# Altium PCB Acoustics Board.PcbDoc (part 2 of 2)
Units mm, origin at the board's own origin, x right, y up, seen from the top; angles counter-clockwise.
Board outline 152.4 x 101.6 mm, 2 copper layers (Top Layer, Bottom Layer); 115 components, 80 nets, 404 pads, 173 vias.
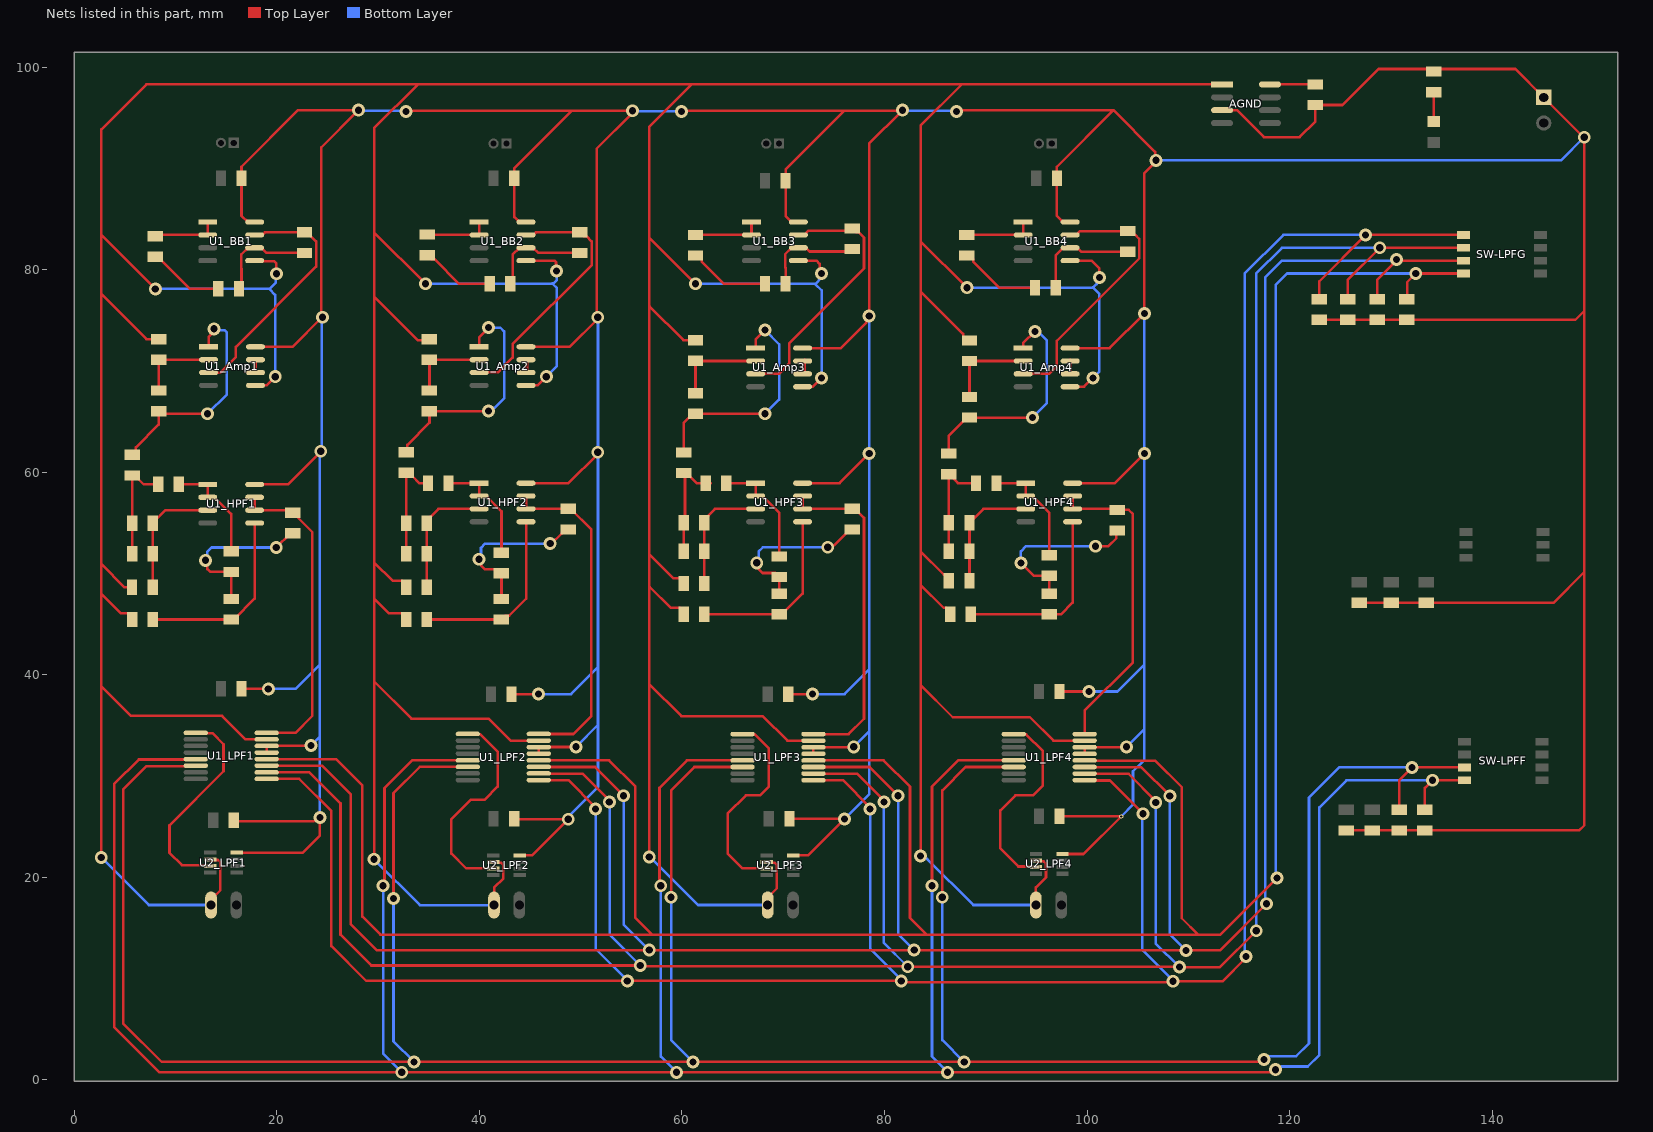
[diagram p2: the nets of this part, all layers, seen from the top]

## Via types
v1: diameter 1.27, hole 0.711, Top Layer to Bottom Layer, 172 vias
v2: diameter 0.4, hole 0.2, Top Layer to Bottom Layer, 1 vias

## Nets (pads, with @x,y where several pads share a name; then routed paths per layer and width w, separated by ;. In a path a pad name is that pad's centre, name@x,y a point inside that pad or via, vN(x,y) a via of type N, cw(c..) or ccw(c..) an arc to the next point about the centre after c; other vN are vias at no path point) (continued)
LPF_FC_SEL2: R3F.2 SW-LPFF.3 U1_LPF1.6 U1_LPF2.6 U1_LPF3.6 U1_LPF4.6 | length 303.3
  Top Layer w0.254: U1_LPF1.6@11.994,31.029 11.956,30.991 7.115,30.991 4.826,28.702 4.826,5.588 8.636,1.778 v1(33.535,1.778) v1(61.087,1.778) v1(87.869,1.778) 116.95,1.778 117.204,2.032 v1(117.479,2.032) ; v1(31.518,17.907) 31.518,28.32 34.11,30.912 U1_LPF2.6@38.809,30.912 ; v1(58.928,18.034) 58.928,28.596 61.232,30.9 U1_LPF3.6@65.931,30.9 ; v1(85.71,18.036) 85.71,28.598 88.014,30.902 U1_LPF4.6@92.713,30.902 ; R3F.2@130.81,26.67 130.81,29.591 v1(132.08,30.861) SW-LPFF.3@137.287,30.861
  Bottom Layer w0.254: v1(31.518,17.907) 31.518,3.816 v1@33.535,1.799 ; v1(58.928,18.034) 58.928,3.937 v1(61.087,1.778) ; v1(85.71,18.036) 85.71,3.939 v1@87.869,1.78 ; v1(117.479,2.032) 117.754,2.032 118.062,2.34 120.641,2.34 121.92,3.619 121.92,27.88 124.901,30.861 v1(132.08,30.861)
LPF_FC_SEL3: R4F.2 SW-LPFF.4 U1_LPF1.5 U1_LPF2.5 U1_LPF3.5 U1_LPF4.5 | length 312.1
  Top Layer w0.254: U1_LPF1.5@11.994,31.679 11.956,31.641 6.368,31.641 3.937,29.21 3.937,5.207 8.382,0.762 v1(32.329,0.762) v1@59.452,0.762 ; v1@30.502,19.177 30.629,19.303 30.629,28.828 33.363,31.562 U1_LPF2.5@38.862,31.563 ; v1(57.912,19.177) 57.785,19.304 57.785,28.85 60.485,31.55 U1_LPF3.5@65.984,31.55 ; v1@59.453,0.752 v1(86.234,0.752) 118.079,0.752 118.343,1.016 v1(118.618,1.016) ; v1(84.694,19.179) 84.694,28.979 87.267,31.552 U1_LPF4.5@92.766,31.552 ; R4F.2@133.35,26.67 133.35,28.829 v1(134.112,29.591) SW-LPFF.4@137.287,29.591
  Bottom Layer w0.254: v1(30.48,19.177) 30.502,19.155 30.502,2.611 v1@32.329,0.783 ; v1(57.912,19.177) 57.912,2.311 v1@59.452,0.771 ; v1(84.694,19.179) 84.694,2.312 v1@86.234,0.773 ; v1(118.618,1.016) 118.893,1.016 119.201,1.324 121.793,1.324 122.936,2.467 122.936,26.924 125.603,29.591 v1(134.112,29.591)
  other v1: 59.452,0.75
LPF_G_SEL0: R1FG.2 SW-LPFG.1 U1_LPF1.9 U1_LPF2.9 U1_LPF3.9 U1_LPF4.9 | length 287.8
  Top Layer w0.254: U1_LPF1.9@18.994,29.729 22.214,29.729 25.39,26.553 25.39,13.218 28.829,9.779 v1(54.61,9.779) v1(81.661,9.779) 81.788,9.652 108.406,9.652 v1(108.497,9.744) 113.376,9.744 115.697,12.065 v1(115.697,12.192) ; U1_LPF2.9@45.874,29.601 48.779,29.601 51.469,26.911 v1(51.469,26.75) ; U1_LPF3.9@72.984,29.601 75.889,29.601 v1@78.58,26.911 ; U1_LPF4.9@99.821,29.566 102.26,29.566 v1(105.537,26.289) ; R1FG.2@122.936,77.089 122.936,78.867 v1(127.508,83.439) SW-LPFG.1@137.16,83.439
  Bottom Layer w0.254: v1(51.469,26.75) 51.491,26.729 51.491,12.919 v1@54.61,9.8 ; v1@78.601,26.729 78.601,12.919 v1@81.721,9.8 ; v1(105.537,26.289) 105.438,26.19 105.438,12.884 v1@108.557,9.765 ; v1(115.697,12.192) 115.57,12.319 115.57,79.629 119.38,83.439 v1(127.508,83.439)
  other v1: 78.58,26.75
LPF_G_SEL1: R2FG.2 SW-LPFG.2 U1_LPF1.10 U1_LPF2.10 U1_LPF3.10 U1_LPF4.10 | length 283.5
  Top Layer w0.254: U1_LPF1.10@19.007,30.379 23.215,30.379 26.289,27.305 26.289,14.351 29.337,11.303 v1(55.88,11.303) 55.944,11.239 82.233,11.239 v1(82.296,11.176) 109.097,11.176 v1(109.132,11.141) 113.122,11.141 v1(116.713,14.732) ; U1_LPF2.10@45.874,30.251 50.172,30.251 52.832,27.592 v1(52.832,27.432) ; U1_LPF3.10@72.984,30.251 77.283,30.251 v1@79.943,27.592 ; U1_LPF4.10@99.821,30.216 104.12,30.216 v1@106.779,27.556 ; R2FG.2@125.73,77.089 125.73,78.994 v1(128.905,82.169) SW-LPFG.2@137.16,82.169
  Bottom Layer w0.254: v1(52.832,27.432) 52.854,27.41 52.854,14.35 v1@55.88,11.324 ; v1@79.964,27.41 79.943,27.389 79.943,13.529 v1(82.296,11.176) ; v1@106.779,27.353 106.779,13.494 v1(109.132,11.141) ; v1(116.713,14.732) 116.695,14.75 116.695,79.611 119.253,82.169 v1@128.778,82.169
  other v1: 106.779,27.397 79.943,27.432
LPF_G_SEL2: R3FG.2 SW-LPFG.3 U1_LPF1.11 U1_LPF2.11 U1_LPF3.11 U1_LPF4.11 | length 279
  Top Layer w0.254: U1_LPF1.11@18.994,31.029 24.47,31.029 27.305,28.194 27.305,15.367 29.845,12.827 v1(56.769,12.827) v1(82.931,12.827) 109.732,12.827 v1(109.767,12.792) ; U1_LPF2.11@45.874,30.901 51.427,30.901 54.229,28.1 v1(54.229,28.067) ; U1_LPF3.11@72.984,30.901 78.538,30.901 v1@81.34,28.1 ; U1_LPF4.11@99.821,30.866 105.375,30.866 v1@108.176,28.064 ; v1@109.771,12.795 109.774,12.792 113.122,12.792 v1(117.729,17.399) ; R3FG.2@128.651,77.089 128.651,78.994 v1@130.556,80.899 ; v1(130.57,81.02) 130.57,80.913 v1@130.556,80.899 ; SW-LPFG.3@137.16,80.899 v1@130.556,80.899
  Bottom Layer w0.254: v1(54.229,28.067) 54.251,28.045 54.251,15.366 v1@56.769,12.848 ; v1@81.361,28.045 81.34,28.024 81.34,14.418 v1(82.931,12.827) ; v1@108.176,27.988 108.176,14.383 v1(109.767,12.792) ; v1(117.729,17.399) 117.593,17.535 117.593,79.239 119.253,80.899 v1@130.175,80.899 ; v1@130.449,80.899 v1(130.57,81.02)
  other v1: 108.176,28.032 81.34,28.067
LPF_G_SEL3: R4FG.2 SW-LPFG.4 U1_LPF1.12 U1_LPF2.12 U1_LPF3.12 U1_LPF4.12 | length 275
  Top Layer w0.254: U1_LPF1.12@18.994,31.679 25.852,31.679 28.448,29.083 28.448,16.129 30.226,14.351 57.056,14.351 ; U1_LPF2.12@45.874,31.551 52.809,31.551 55.405,28.955 55.405,16.001 57.056,14.351 ; U1_LPF3.12@72.984,31.551 79.92,31.551 82.516,28.955 82.516,16.001 84.166,14.351 ; U1_LPF4.12@99.821,31.516 106.757,31.516 109.353,28.92 109.353,15.966 110.967,14.351 ; v1(118.745,19.939) 113.157,14.351 110.967,14.351 ; R4FG.2@131.572,77.089 131.598,77.115 131.598,78.766 v1(132.461,79.629) SW-LPFG.4@137.16,79.629 ; 57.056,14.351 84.166,14.351 ; 84.166,14.351 110.967,14.351
  Bottom Layer w0.254: v1(118.745,19.939) 118.618,20.066 118.618,78.486 119.761,79.629 v1(132.461,79.629)
LPF_IN_LPF1: R4_HPF1.2 U1_HPF1.6 U1_HPF1.7 U1_LPF1.16 | length 31.1
  Top Layer w0.254: U1_HPF1.7@17.81,57.531 U1_HPF1.6@17.81,56.261 R4_HPF1.2@21.59,56.261 ; U1_LPF1.16@18.994,34.279 21.833,34.279 23.495,35.941 23.495,54.102 R4_HPF1.2@21.59,56.007
LPF_IN_LPF2: R4_HPF2.2 U1_HPF2.6 U1_HPF2.7 U1_LPF2.16 | length 32.9
  Top Layer w0.254: U1_HPF2.6@44.607,56.388 R4_HPF2.2@48.768,56.388 ; U1_HPF2.6@44.607,56.388 44.629,56.41 44.629,57.636 U1_HPF2.7@44.607,57.658 ; U1_LPF2.16@45.862,34.163 49.283,34.163 51.054,35.934 51.054,54.356 49.022,56.388 R4_HPF2.2@48.768,56.388
LPF_IN_LPF3: R4_HPF3.2 U1_HPF3.6 U1_HPF3.7 U1_LPF3.16 | length 33.1
  Top Layer w0.254: U1_HPF3.7@71.912,57.658 U1_HPF3.6@71.912,56.388 76.58,56.388 R4_HPF3.2@76.708,56.261 ; U1_LPF3.16@72.984,34.151 76.465,34.151 77.978,35.665 77.978,55.499 77.089,56.388 R4_HPF3.2@76.835,56.388
LPF_IN_LPF4: R4_HPF4.2 U1_HPF4.6 U1_HPF4.7 U1_LPF4.16 | length 31.1
  Top Layer w0.254: U1_HPF4.7@98.582,57.658 U1_HPF4.6@98.582,56.388 102.891,56.388 R4_HPF4.2@102.997,56.282 104.119,56.282 104.521,55.88 104.521,41.235 99.766,36.48 U1_LPF4.16@99.766,34.152
LPF_TO_AMP_LPF1: U1_LPF1.1 U2_LPF1.3 | length 20.7
  Top Layer w0.254: U1_LPF1.1@11.994,34.279 12.032,34.241 13.638,34.241 14.732,33.147 14.732,30.48 9.398,25.146 9.398,22.423 10.614,21.207 13.353,21.207 U2_LPF1.3@13.422,21.138
LPF_TO_AMP_LPF2: U1_LPF2.1 U2_LPF2.3 | length 21.1
  Top Layer w0.254: U1_LPF2.1@38.883,34.163 38.92,34.125 U1_LPF2.1@40.013,34.125 ; U1_LPF2.1@40.014,34.125 40.103,34.125 41.805,32.423 41.805,28.955 40.535,27.685 39.172,27.685 37.233,25.746 37.233,22.353 38.703,20.883 U2_LPF2.3@41.362,20.884
LPF_TO_AMP_LPF3: U1_LPF3.1 U2_LPF3.3 | length 20.5
  Top Layer w0.254: U1_LPF3.1@65.984,34.151 66.022,34.114 67.204,34.114 68.58,32.738 68.58,28.955 67.724,28.1 66.327,28.1 64.516,26.289 64.516,22.352 65.985,20.883 U2_LPF3.3@68.373,20.883
LPF_TO_AMP_LPF4: U1_LPF4.1 U2_LPF4.3 | length 20.2
  Top Layer w0.254: U1_LPF4.1@92.766,34.152 92.804,34.114 93.986,34.114 95.631,32.469 95.631,29.083 94.648,28.1 92.915,28.1 91.44,26.625 91.44,22.86 93.22,21.08 94.887,21.08 U2_LPF4.3@94.956,21.011
NetAGND_1: AGND.1 J1_Ch1.2 J1_Ch2.2 J1_Ch3.2 J1_Ch4.2 R1_Amp1.1 R1_Amp2.1 R1_Amp3.1 R1_Amp4.1 R1_HPF1.1 R1_HPF2.1 R1_HPF3.1 R1_HPF4.1 R2_HPF1.1 R2_HPF2.1 R2_HPF3.1 R2_HPF4.1 U1_Amp1.5 U1_Amp2.5 U1_Amp3.5 U1_Amp4.5 U1_BB1.5 U1_BB2.5 U1_BB3.5 U1_BB4.5 U1_LPF1.15 U1_LPF2.15 U1_LPF3.15 U1_LPF4.15 U2_LPF1.2 U2_LPF2.2 U2_LPF3.2 U2_LPF4.2 | length 771.4
  Top Layer w0.254: v1(2.667,21.971) 2.667,38.862 ; R1_HPF1.1@5.705,48.641 4.953,48.641 2.667,50.927 ; R2_HPF1.1@5.715,45.466 5.715,45.72 5.334,46.101 4.572,46.101 2.667,48.006 ; v1(8.001,78.105) 2.667,83.439 ; R1_Amp1.1@8.334,73.152 7.112,73.152 2.667,77.597 ; U2_LPF1.2@13.422,21.788 13.491,21.719 14.19,21.719 14.413,21.496 14.413,18.724 13.756,18.067 13.756,17.272 J1_Ch1.2@13.502,17.272 ; U1_BB1.5@17.81,80.899 17.859,80.85 19.734,80.85 19.958,80.626 v1(19.958,79.61) ; U1_Amp1.5@18.491,68.58 18.972,68.58 v1(19.837,69.444) ; U1_LPF1.15@18.994,33.629 16.917,33.629 14.605,35.941 5.588,35.941 2.667,38.862 ; v1(29.591,21.788) 29.613,21.81 29.613,39.369 ; R2_HPF2.1@32.766,45.466 32.766,45.719 32.385,46.1 31.04,46.1 29.613,47.527 ; R1_HPF2.1@32.766,48.641 32.766,48.894 32.385,49.275 31.45,49.275 29.613,51.113 ; v1@34.671,78.634 29.613,83.692 ; R1_Amp2.1@35.052,73.152 34.924,73.024 33.931,73.024 29.613,77.342 ; U2_LPF2.2@41.383,21.534 41.452,21.465 42.151,21.465 42.375,21.241 42.375,19.897 41.464,18.986 41.464,17.294 J1_Ch2.2@41.442,17.272 ; U1_BB2.5@44.607,80.899 47.414,80.898 47.563,80.749 47.563,79.966 v1@47.625,79.904 ; U1_Amp2.5@45.263,68.58 45.745,68.58 v1(46.609,69.444) ; U1_LPF2.15@45.862,33.513 43.09,33.512 40.916,35.686 33.296,35.686 29.613,39.369 ; v1(56.769,22.012) 56.769,39.116 ; 56.811,76.369 60.133,73.047 R1_Amp3.1@61.341,73.047 ; 56.821,48.693 58.906,46.608 59.795,46.608 60.176,46.227 R2_HPF3.1@60.176,45.973 ; R1_HPF3.1@60.176,49.023 60.176,49.148 59.795,49.529 59.16,49.529 56.769,51.921 ; v1(61.341,78.613) 56.769,83.185 ; U2_LPF3.2@68.373,21.533 68.442,21.464 69.141,21.464 69.364,21.241 69.364,18.93 68.468,18.034 J1_Ch3.2@68.468,17.272 ; U1_BB3.5@71.501,80.899 73.279,80.899 73.593,80.585 73.593,79.823 v1(73.787,79.629) ; U1_Amp3.5@72.441,68.453 72.923,68.453 v1(73.787,69.317) ; U1_LPF3.15@72.984,33.501 70.407,33.501 67.974,35.934 59.951,35.934 56.769,39.116 ; v1(83.566,22.114) 83.566,38.989 ; R1_HPF4.1@86.36,49.276 86.36,49.53 85.979,49.911 85.851,49.911 83.566,52.196 ; R2_HPF4.1@86.487,45.974 86.487,46.228 86.106,46.609 85.852,46.609 83.566,48.895 ; v1(88.138,78.232) 83.566,82.804 ; R1_Amp4.1@88.392,73.025 88.138,73.025 87.757,73.406 87.757,73.66 83.566,77.851 ; J1_Ch4.2@94.956,17.272 94.956,19.012 95.947,20.003 95.947,21.369 95.724,21.592 95.025,21.592 U2_LPF4.2@94.956,21.661 ; U1_BB4.5@98.328,80.899 100.441,80.899 101.219,80.121 v1(101.219,79.248) ; U1_Amp4.5@99.238,68.453 99.72,68.453 v1(100.584,69.317) ; U1_LPF4.15@99.766,33.502 96.673,33.502 94.361,35.814 86.741,35.814 83.566,38.989 ; AGND.1@113.333,98.298 87.63,98.298 ; 2.667,38.862 2.667,48.006 ; 2.667,48.006 2.667,50.927 ; 2.667,50.927 2.667,52.451 2.667,77.597 ; 2.667,77.597 2.667,83.439 ; 2.667,83.439 2.667,93.853 7.112,98.298 33.909,98.298 33.931,98.298 ; 29.613,39.369 29.613,47.527 ; 29.613,47.527 29.613,51.113 ; 29.613,51.113 29.613,77.342 ; 29.613,77.342 29.613,83.692 ; 29.613,83.692 29.613,93.979 33.931,98.298 ; 33.931,98.298 40.894,98.298 60.96,98.298 ; 56.769,39.116 56.769,51.921 ; 56.769,51.921 56.769,83.185 ; 56.769,83.185 56.769,94.107 60.96,98.298 ; 60.96,98.298 87.63,98.298 ; 83.566,38.989 83.566,48.895 ; 83.566,48.895 83.566,52.196 ; 83.566,52.196 83.566,77.851 ; 83.566,77.851 83.566,82.804 ; 83.566,82.804 83.566,94.234 87.63,98.298
  Bottom Layer w0.254: v1(2.667,21.971) 7.366,17.272 J1_Ch1.2@13.502,17.272 ; v1(8.001,78.105) 19.256,78.105 ; v1(19.837,69.444) 19.837,77.525 19.256,78.105 ; v1(19.958,79.61) 19.895,79.548 19.895,78.744 19.256,78.105 ; v1@29.612,21.788 34.129,17.271 J1_Ch2.2@41.441,17.271 ; v1(34.671,78.613) 47.245,78.612 ; v1(46.609,69.444) 47.647,70.482 47.647,78.21 47.245,78.612 ; 47.207,78.65 47.245,78.612 ; v1(47.625,79.883) 47.647,79.861 47.647,78.993 47.266,78.612 47.245,78.612 ; v1(56.769,22.012) 56.856,22.012 61.596,17.272 J1_Ch3.2@68.468,17.272 ; v1(61.341,78.613) 73.187,78.613 73.787,79.213 v1(73.787,79.629) ; 73.207,78.558 73.787,77.978 v1(73.787,69.317) ; v1(83.566,22.114) 83.841,22.114 84.123,21.832 84.213,21.832 88.773,17.272 J1_Ch4.2@94.956,17.272 ; v1(88.138,78.232) 100.584,78.232 100.945,78.593 100.945,78.699 101.219,78.973 v1(101.219,79.248) ; 100.568,78.248 101.219,77.597 101.219,69.952 v1(100.584,69.317)
NetAGND_8: AGND.8 C1_AGND.1 | length 4.2
  Top Layer w0.254: AGND.8@118.061,98.298 C1_AGND.1@122.301,98.298
NetC1_BB1_1: C1_BB1.1 U1_BB1.1 U1_BB1.2 | length 6.1
  Top Layer w0.254: C1_BB1.1@8.382,83.439 U1_BB1.2@13.178,83.439 U1_BB1.1@13.178,84.709
NetC1_BB1_2: C1_BB1.2 R2_BB1.1 | length 7.2
  Top Layer w0.254: C1_BB1.2@8.383,81.152 11.43,78.105 R2_BB1.1@14.351,78.105
NetC1_BB2_1: C1_BB2.1 U1_BB2.1 U1_BB2.2 | length 6.4
  Top Layer w0.254: C1_BB2.1@34.882,83.474 34.918,83.438 U1_BB2.2@39.975,83.439 ; U1_BB2.2@39.975,83.439 39.997,83.461 39.997,84.687 U1_BB2.1@39.975,84.709
NetC1_BB2_2: C1_BB2.2 R2_BB2.1 | length 7.3
  Top Layer w0.254: C1_BB2.2@34.882,81.442 35.263,81.061 35.545,81.061 37.995,78.612 R2_BB2.1@41.021,78.613
NetC1_BB3_1: C1_BB3.1 U1_BB3.1 U1_BB3.2 | length 6.8
  Top Layer w0.254: C1_BB3.1@61.341,83.439 U1_BB3.2@66.869,83.439 U1_BB3.1@66.869,84.709
NetC1_BB3_2: C1_BB3.2 R2_BB3.1 | length 8.2
  Top Layer w0.254: C1_BB3.2@61.341,81.407 61.595,81.407 61.976,81.026 61.976,80.772 64.136,78.612 R2_BB3.1@68.199,78.612
NetC1_BB4_1: C1_BB4.1 U1_BB4.1 U1_BB4.2 | length 6.8
  Top Layer w0.254: C1_BB4.1@88.138,83.439 U1_BB4.2@93.696,83.439 U1_BB4.1@93.696,84.709
NetC1_BB4_2: C1_BB4.2 R2_BB4.1 | length 8.2
  Top Layer w0.254: C1_BB4.2@88.138,81.407 88.392,81.407 88.773,81.026 88.773,80.772 91.313,78.232 R2_BB4.1@94.869,78.232
NetC1_HPF1_1: C1_HPF1.1 R2_Amp1.2 U1_Amp1.1 | length 22.6
  Top Layer w0.254: C1_HPF1.1@5.715,61.722 6.074,62.081 6.074,62.462 8.334,64.722 R2_Amp1.2@8.334,66.04 8.588,65.786 v1(13.16,65.786) ; U1_Amp1.1@13.257,72.39 13.257,73.355 13.795,73.893 v1(13.795,74.168)
  Bottom Layer w0.254: v1(13.16,65.786) 15.065,67.691 15.065,73.787 14.811,74.041 13.922,74.041 v1(13.795,74.168)
NetC1_HPF1_2: C1_HPF1.2 C2_HPF1.2 C3_HPF1.1 R3_HPF1.1 | length 10.7
  Top Layer w0.254: C2_HPF1.2@5.715,51.943 C3_HPF1.1@5.715,54.991 C1_HPF1.2@5.715,59.69 5.969,59.69 6.858,58.801 R3_HPF1.1@8.296,58.801
NetC1_HPF2_1: C1_HPF2.1 R2_Amp2.2 U1_Amp2.1 | length 23.5
  Top Layer w0.254: C1_HPF2.1@32.766,61.976 32.894,62.104 32.894,62.716 35.074,64.896 35.074,66.018 R2_Amp2.2@35.052,66.04 ; R2_Amp2.2@35.052,66.04 v1(40.894,66.04) ; U1_Amp2.1@39.975,72.39 39.997,72.412 39.997,73.354 40.894,74.252 v1(40.894,74.295)
  Bottom Layer w0.254: v1(40.894,66.04) 41.168,66.039 41.495,66.366 41.497,66.366 42.44,67.309 42.44,73.913 42.059,74.294 v1(40.894,74.295)
NetC1_HPF2_2: C1_HPF2.2 C2_HPF2.2 C3_HPF2.1 R3_HPF2.1 | length 10.6
  Top Layer w0.254: C2_HPF2.2@32.766,51.943 32.788,51.965 32.788,54.969 C3_HPF2.1@32.766,54.991 32.788,55.013 32.788,59.922 C1_HPF2.2@32.766,59.944 ; C1_HPF2.2@32.766,59.944 33.147,59.563 33.422,59.563 34.058,58.927 R3_HPF2.1@34.925,58.928
NetC1_HPF3_1: C1_HPF3.1 R2_Amp3.2 U1_Amp3.1 | length 22.9
  Top Layer w0.254: C1_HPF3.1@60.198,61.954 60.198,64.897 61.087,65.786 R2_Amp3.2@61.341,65.786 v1(68.199,65.786) ; U1_Amp3.1@67.28,72.263 67.28,73.122 v1(68.199,74.041)
  Bottom Layer w0.254: v1(68.199,65.786) 69.596,67.183 69.596,72.644 v1(68.199,74.041)
NetC1_HPF3_2: C1_HPF3.2 C2_HPF3.2 C3_HPF3.1 R3_HPF3.1 | length 10.7
  Top Layer w0.254: C2_HPF3.2@60.176,52.196 C3_HPF3.1@60.176,55.012 ; C1_HPF3.2@60.198,59.922 C1_HPF3.2@60.303,59.922 ; C3_HPF3.1@60.303,55.117 C1_HPF3.2@60.303,59.922 ; 62.865,58.928 R3_HPF3.1@62.357,58.928 61.446,58.928 60.452,59.922 C1_HPF3.2@60.303,59.922
NetC1_HPF4_1: C1_HPF4.1 R2_Amp4.2 U1_Amp4.1 | length 22.6
  Top Layer w0.254: C1_HPF4.1@86.36,61.849 86.36,63.627 88.138,65.405 R2_Amp4.2@88.392,65.405 v1(94.615,65.405) ; U1_Amp4.1@93.696,72.263 93.696,72.762 94.848,73.914 v1(94.869,73.914)
  Bottom Layer w0.254: v1(94.615,65.405) 96.012,66.802 96.012,73.046 95.144,73.914 v1(94.869,73.914)
NetC1_HPF4_2: C1_HPF4.2 C2_HPF4.2 C3_HPF4.1 R3_HPF4.1 | length 10.7
  Top Layer w0.254: C2_HPF4.2@86.36,52.196 C3_HPF4.1@86.36,55.012 C1_HPF4.2@86.36,59.817 87.249,58.928 R3_HPF4.1@89.027,58.928
NetC2_HPF1_1: C2_HPF1.1 C3_HPF1.2 R1_HPF1.2 U1_HPF1.3 | length 12.3
  Top Layer w0.254: R1_HPF1.2@7.737,48.641 7.737,51.933 C2_HPF1.1@7.747,51.943 C3_HPF1.2@7.747,54.991 9.017,56.261 U1_HPF1.3@13.178,56.261
NetC2_HPF2_1: C2_HPF2.1 C3_HPF2.2 R1_HPF2.2 U1_HPF2.3 | length 12.3
  Top Layer w0.254: R1_HPF2.2@34.798,48.641 34.82,48.663 34.82,51.921 C2_HPF2.1@34.798,51.943 34.82,51.965 34.82,54.969 C3_HPF2.2@34.798,54.991 34.798,55.245 35.179,55.626 35.201,55.626 35.963,56.387 U1_HPF2.3@39.975,56.388
NetC2_HPF3_1: C2_HPF3.1 C3_HPF3.2 R1_HPF3.2 U1_HPF3.3 | length 12.6
  Top Layer w0.254: R1_HPF3.2@62.208,49.023 C2_HPF3.1@62.208,52.196 C3_HPF3.2@62.208,55.012 ; C3_HPF3.2@62.589,55.647 62.208,55.266 C3_HPF3.2@62.208,55.012 ; U1_HPF3.3@67.28,56.388 63.247,56.388 62.208,55.35 C3_HPF3.2@62.208,55.012
NetC2_HPF4_1: C2_HPF4.1 C3_HPF4.2 R1_HPF4.2 U1_HPF4.3 | length 12.7
  Top Layer w0.254: R1_HPF4.2@88.392,49.276 C2_HPF4.1@88.392,52.196 C3_HPF4.2@88.392,55.012 ; C3_HPF4.2@88.773,55.647 88.392,55.266 C3_HPF4.2@88.392,55.012 ; U1_HPF4.3@93.95,56.388 89.768,56.388 C3_HPF4.2@88.392,55.012
NetC4_HPF1_1: C4_HPF1.1 R3_HPF1.2 U1_HPF1.1 U1_HPF1.2 | length 10.8
  Top Layer w0.254: R3_HPF1.2@10.328,58.801 U1_HPF1.1@13.178,58.801 U1_HPF1.2@13.178,57.531 13.859,57.531 15.494,55.896 C4_HPF1.1@15.494,52.197
NetC4_HPF1_2: C4_HPF1.2 C5_HPF1.1 R4_HPF1.1 | length 16.2
  Top Layer w0.254: v1(12.954,51.308) 13.148,51.114 13.148,50.444 13.427,50.165 C4_HPF1.2@15.494,50.165 C5_HPF1.1@15.494,47.498 ; v1(19.939,52.578) 21.336,53.975 R4_HPF1.1@21.59,53.975
  Bottom Layer w0.254: v1(12.954,51.308) 13.148,51.502 13.148,52.167 13.559,52.578 v1(19.939,52.578)
NetC4_HPF2_1: C4_HPF2.1 R3_HPF2.2 U1_HPF2.1 U1_HPF2.2 | length 11.2
  Top Layer w0.254: R3_HPF2.2@36.957,58.928 U1_HPF2.1@39.975,58.928 ; U1_HPF2.2@39.975,57.658 39.997,57.68 39.997,58.906 U1_HPF2.1@39.975,58.928 ; U1_HPF2.2@39.975,57.658 40.678,57.657 42.186,56.149 42.186,52.092 C4_HPF2.1@42.164,52.07
NetC4_HPF2_2: C4_HPF2.2 C5_HPF2.1 R4_HPF2.1 | length 16.1
  Top Layer w0.254: v1@39.996,51.419 40.169,51.246 40.169,50.801 40.552,50.418 41.805,50.418 C4_HPF2.2@42.164,50.059 ; C5_HPF2.1@42.164,47.498 42.186,47.52 42.186,50.016 C4_HPF2.2@42.164,50.038 ; v1(46.99,52.959) 47.139,52.958 48.133,53.953 48.133,53.975 48.513,54.355 R4_HPF2.1@48.768,54.356
  Bottom Layer w0.254: v1@39.997,51.419 40.16,51.582 40.16,52.546 40.572,52.958 v1(46.99,52.959)
  other v1: 39.975,51.419
NetC4_HPF3_1: C4_HPF3.1 R3_HPF3.2 U1_HPF3.1 U1_HPF3.2 | length 11
  Top Layer w0.254: 64.897,58.928 U1_HPF3.1@67.28,58.928 U1_HPF3.2@67.28,57.658 67.961,57.658 69.596,56.023 C4_HPF3.1@69.596,51.689
NetC4_HPF3_2: C4_HPF3.2 C5_HPF3.1 R4_HPF3.1 | length 14.6
  Top Layer w0.254: 67.58,50.442 67.963,50.059 C4_HPF3.2@69.215,50.059 ; C5_HPF3.1@69.596,48.006 C4_HPF3.2@69.596,49.657 ; v1(74.4,52.6) 74.595,52.794 75.019,52.794 76.581,54.356 R4_HPF3.1@76.835,54.356
  Bottom Layer w0.254: v1@67.57,51.222 67.57,52.187 67.982,52.599 v1@74.4,52.599
  other v1: 67.385,51.06
NetC4_HPF4_1: C4_HPF4.1 R3_HPF4.2 U1_HPF4.1 U1_HPF4.2 | length 11.4
  Top Layer w0.254: R3_HPF4.2@91.059,58.928 U1_HPF4.1@93.95,58.928 U1_HPF4.2@93.95,57.658 94.631,57.658 96.266,56.023 C4_HPF4.1@96.266,51.816
NetC4_HPF4_2: C4_HPF4.2 C5_HPF4.1 R4_HPF4.1 | length 18.1
  Top Layer w0.254: v1(93.472,51.054) 94.742,49.784 C4_HPF4.2@96.266,49.784 C5_HPF4.1@96.266,48.006 ; v1@101.032,52.899 v1(100.838,52.705) 102.108,52.705 102.891,53.488 102.891,54.144 R4_HPF4.1@102.997,54.25 102.743,54.25 R4_HPF4.1@102.362,53.869
  Bottom Layer w0.254: v1(93.472,51.054) 93.472,52.197 93.98,52.705 v1(100.838,52.705)
NetC5_HPF1_2: C5_HPF1.2 R2_HPF1.2 U1_HPF1.5 | length 18.4
  Top Layer w0.254: R2_HPF1.2@7.747,45.466 C5_HPF1.2@15.494,45.466 15.748,45.466 17.81,47.528 U1_HPF1.5@17.81,54.991
NetC5_HPF2_2: C5_HPF2.2 R2_HPF2.2 U1_HPF2.5 | length 18.3
  Top Layer w0.254: R2_HPF2.2@34.798,45.466 C5_HPF2.2@42.164,45.466 ; C5_HPF2.2@42.186,45.466 42.567,45.847 42.948,45.847 44.629,47.527 44.629,54.999 44.607,55.02 U1_HPF2.5@44.607,55.118
NetC5_HPF3_2: C5_HPF3.2 R2_HPF3.2 U1_HPF3.5 | length 17.6
  Top Layer w0.254: R2_HPF3.2@62.209,45.974 69.484,45.974 69.85,45.974 71.912,48.036 U1_HPF3.5@71.912,55.118
NetC5_HPF4_2: C5_HPF4.2 R2_HPF4.2 U1_HPF4.5 | length 18.5
  Top Layer w0.254: R2_HPF4.2@88.519,45.974 C5_HPF4.2@96.266,45.974 97.409,45.974 98.582,47.147 U1_HPF4.5@98.582,55.118
NetLED_2: LED.2 R1-DIO.2 | length 2.9
  Top Layer w0.254: LED.2@134.239,94.649 R1-DIO.2@134.239,97.536
NetR1_Amp1_2: R1_Amp1.2 R2_Amp1.1 U1_Amp1.2 | length 8
  Top Layer w0.254: R2_Amp1.1@8.334,68.072 R1_Amp1.2@8.334,71.12 U1_Amp1.2@13.257,71.12
NetR1_Amp2_2: R1_Amp2.2 R2_Amp2.1 U1_Amp2.2 | length 8
  Top Layer w0.254: R2_Amp2.1@35.052,68.072 35.074,68.094 35.074,71.098 R1_Amp2.2@35.052,71.12 ; R1_Amp2.2@35.052,71.12 U1_Amp2.2@39.975,71.12
NetR1_Amp3_2: R1_Amp3.2 R2_Amp3.1 U1_Amp3.2 | length 9.1
  Top Layer w0.254: R2_Amp3.1@61.341,67.818 R1_Amp3.2@61.341,71.015 61.363,70.993 U1_Amp3.2@67.28,70.993
NetR1_Amp4_2: R1_Amp4.2 R2_Amp4.1 U1_Amp4.2 | length 8.9
  Top Layer w0.254: R2_Amp4.1@88.392,67.437 R1_Amp4.2@88.392,70.993 U1_Amp4.2@93.696,70.993
NetR2_BB1_2: R2_BB1.2 R3_BB1.1 U1_BB1.6 | length 10.1
  Top Layer w0.254: R2_BB1.2@16.51,78.105 16.51,80.092 16.492,80.11 16.492,81.532 17.129,82.169 U1_BB1.6@17.81,82.169 18.491,82.169 18.999,81.661 R3_BB1.1@22.733,81.661
NetR2_BB2_2: R2_BB2.2 R3_BB2.1 U1_BB2.6 | length 10.1
  Top Layer w0.254: R2_BB2.2@43.075,78.613 43.311,78.848 43.311,80.613 43.289,80.635 43.289,81.509 43.948,82.168 U1_BB2.6@44.607,82.169 ; U1_BB2.6@44.607,82.169 45.309,82.169 45.818,81.66 R3_BB2.1@49.911,81.661
NetR2_BB3_2: R2_BB3.2 R3_BB3.1 U1_BB3.6 | length 10
  Top Layer w0.254: R2_BB3.2@70.231,78.612 70.231,80.181 70.183,80.229 70.183,81.532 70.82,82.169 U1_BB3.6@71.501,82.169 72.252,82.169 72.619,81.802 R3_BB3.1@76.835,81.802
NetR2_BB4_2: R2_BB4.2 R3_BB4.1 U1_BB4.6 | length 10.8
  Top Layer w0.254: R2_BB4.2@96.901,78.232 96.901,81.423 97.647,82.169 U1_BB4.6@98.328,82.169 99.033,82.169 99.414,81.788 R3_BB4.1@104.013,81.788
NetR3_BB1_2: R3_BB1.2 U1_Amp1.3 U1_BB1.7 | length 24.6
  Top Layer w0.254: U1_Amp1.3@13.257,69.85 14.43,69.85 15.954,71.374 15.954,72.39 23.876,80.312 23.876,82.804 22.987,83.693 18.815,83.693 18.561,83.439 U1_BB1.7@17.81,83.439
NetR3_BB2_2: R3_BB2.2 U1_Amp2.3 U1_BB2.7 | length 25.5
  Top Layer w0.254: U1_Amp2.3@39.975,69.85 39.988,69.863 41.819,69.863 43.289,71.334 43.289,72.654 51.076,80.441 51.076,82.803 50.567,83.312 50.313,83.312 R3_BB2.2@49.932,83.693 ; U1_BB2.7@44.607,83.439 45.334,83.438 45.588,83.692 R3_BB2.2@49.911,83.693
NetR3_BB3_2: R3_BB3.2 U1_Amp3.3 U1_BB3.7 | length 26.4
  Top Layer w0.254: U1_Amp3.3@67.28,69.723 69.596,69.723 70.594,70.721 70.594,72.737 77.978,80.121 77.978,83.185 77.47,83.693 77.216,83.693 R3_BB3.2@76.835,84.074 ; U1_BB3.7@71.501,83.439 72.112,83.439 72.311,83.638 72.311,83.685 72.46,83.834 76.835,83.834 R3_BB3.2@76.835,83.954
NetR3_BB4_2: R3_BB4.2 U1_Amp4.3 U1_BB4.7 | length 26.8
  Top Layer w0.254: U1_Amp4.3@93.696,69.723 96.266,69.723 97.01,70.467 97.01,72.976 105.156,81.122 105.156,83.058 104.775,83.439 104.394,83.439 R3_BB4.2@104.013,83.82 ; U1_BB4.7@98.328,83.439 98.939,83.439 99.138,83.638 99.138,83.671 99.287,83.82 R3_BB4.2@103.901,83.82
NetU1_Amp1_6: U1_Amp1.6 U1_Amp1.7 | length 1.3
  Top Layer w0.254: U1_Amp1.6@17.89,69.85 U1_Amp1.7@17.89,71.12
NetU1_Amp2_6: U1_Amp2.6 U1_Amp2.7 | length 1.3
  Top Layer w0.254: U1_Amp2.6@44.704,69.977 U1_Amp2.7@44.704,71.247
NetU1_Amp3_6: U1_Amp3.6 U1_Amp3.7 | length 1.3
  Top Layer w0.254: U1_Amp3.6@72.112,69.832 U1_Amp3.7@72.112,71.102
NetU1_Amp4_6: U1_Amp4.6 U1_Amp4.7 | length 1.3
  Top Layer w0.254: U1_Amp4.6@98.328,69.832 U1_Amp4.7@98.328,71.102
V+: AGND.3 C1_AGND.2 C1_LPF1.1 C1_LPF2.1 C1_LPF3.1 C1_LPF4.1 C2_LPF1.1 C2_LPF2.1 C2_LPF3.1 C2_LPF4.1 Power.1 R1-DIO.1 R1_BB1.1 R1_BB2.1 R1_BB3.1 R1_BB4.1 R1AG.1 R1F.1 R1FG.1 R2AG.1 R2F.1 R2FG.1 R3AG.1 R3F.1 R3FG.1 R4F.1 R4FG.1 U1_Amp1.8 U1_Amp2.8 U1_Amp3.8 U1_Amp4.8 U1_BB1.8 U1_BB2.8 U1_BB3.8 U1_BB4.8 U1_HPF1.8 U1_HPF2.8 U1_HPF3.8 U1_HPF4.8 U1_LPF1.13 U1_LPF1.14 U1_LPF2.13 U1_LPF2.14 U1_LPF3.13 U1_LPF3.14 U1_LPF4.13 U1_LPF4.14 U2_LPF1.8 U2_LPF2.8 U2_LPF3.8 U2_LPF4.8 | length 842
  Top Layer w0.254: C2_LPF1.1@15.682,25.527 23.601,25.527 23.982,25.908 v1(24.257,25.908) 24.257,24.13 22.565,22.438 U2_LPF1.8@16.042,22.438 ; C1_LPF1.1@16.51,38.641 16.51,38.608 v1(19.161,38.608) ; R1_BB1.1@16.51,88.773 16.51,85.328 17.129,84.709 U1_BB1.8@17.81,84.709 ; R1_BB1.1@16.51,89.027 16.51,90.17 22.098,95.758 v1(28.067,95.758) 24.384,92.075 24.384,75.438 v1(24.511,75.311) 24.463,75.311 21.542,72.39 U1_Amp1.8@17.89,72.39 ; U1_HPF1.8@17.81,58.801 21.082,58.801 24.338,62.057 v1(24.338,62.081) ; U1_LPF1.13@18.994,32.329 U1_LPF1.14@18.994,32.979 19.015,32.999 23.347,32.999 v1(23.368,33.02) ; v1(32.766,95.631) 32.829,95.694 49.108,95.694 ; C1_LPF2.1@43.18,38.1 v1(45.842,38.1) ; C2_LPF2.1@43.434,25.781 43.469,25.746 v1(48.779,25.746) 45.216,22.183 U2_LPF2.8@43.982,22.184 ; U1_BB2.8@44.607,84.709 43.948,84.708 43.456,85.2 43.456,89.005 R1_BB2.1@43.434,89.027 43.456,89.049 43.456,90.042 49.108,95.694 ; U1_HPF2.8@44.607,58.928 48.79,58.927 51.689,61.827 v1(51.689,61.976) ; U1_Amp2.8@44.607,72.39 48.917,72.389 51.689,75.162 v1(51.689,75.311) ; U1_LPF2.13@45.862,32.213 U1_LPF2.14@45.862,32.863 45.877,32.878 49.515,32.878 v1(49.53,32.893) ; v1@51.689,75.332 51.584,75.437 51.584,91.947 55.118,95.482 v1(55.118,95.694) 49.108,95.694 ; v1(59.944,95.631) 60.008,95.694 76.01,95.694 ; C1_LPF3.1@70.5,38.1 v1(72.884,38.099) ; C2_LPF3.1@70.612,25.78 v1(76.058,25.78) 72.461,22.183 U2_LPF3.8@70.993,22.183 ; U1_BB3.8@71.501,84.709 70.82,84.709 70.231,85.298 R1_BB3.1@70.231,88.773 70.231,89.916 76.01,95.694 ; U1_HPF3.8@71.912,58.928 75.565,58.928 v1(78.486,61.849) ; U1_Amp3.8@71.912,72.263 75.692,72.263 78.212,74.783 78.212,74.889 78.486,75.163 v1(78.486,75.438) 78.486,92.456 v1@81.724,95.694 ; U1_LPF3.13@72.984,32.201 U1_LPF3.14@72.984,32.851 73.005,32.872 76.941,32.872 v1(76.962,32.893) ; v1(81.788,95.758) v1@81.724,95.694 ; v1(87.122,95.631) 87.249,95.758 102.616,95.758 ; C2_LPF4.1@97.282,26.035 v2(103.378,26.035) 99.654,22.311 U2_LPF4.8@97.576,22.311 ; C1_LPF4.1@97.282,38.354 v1(100.203,38.354) ; U1_Amp4.8@98.328,72.263 102.235,72.263 v1(105.664,75.692) 105.664,89.535 106.807,90.678 v1(106.807,90.805) 106.724,90.888 106.724,91.65 102.616,95.758 ; U1_BB4.8@98.328,84.709 97.647,84.709 97.028,85.328 R1_BB4.1@97.028,89.027 97.028,90.17 102.616,95.758 ; U1_HPF4.8@98.582,58.928 102.743,58.928 v1(105.664,61.849) ; U1_LPF4.13@99.766,32.202 U1_LPF4.14@99.766,32.852 99.787,32.872 103.865,32.872 v1(103.886,32.893) ; AGND.3@113.333,95.758 114.808,95.758 117.475,93.091 120.997,93.091 122.555,94.649 C1_AGND.2@122.555,96.266 125.222,96.266 128.778,99.822 142.304,99.822 Power.1@145.098,97.028 149.098,93.028 149.098,75.946 ; R1FG.1@122.936,75.057 R2FG.1@125.73,75.057 R3FG.1@128.651,75.057 R4FG.1@131.572,75.057 148.209,75.057 149.098,75.946 ; R1F.1@125.603,24.638 R2F.1@128.143,24.638 R3F.1@130.81,24.638 R4F.1@133.35,24.638 148.59,24.638 149.098,25.146 149.098,50.165 ; R1AG.1@126.873,47.117 R2AG.1@130.048,47.117 R3AG.1@133.477,47.117 146.05,47.117 149.098,50.165 ; 76.01,95.694 v1@81.724,95.694 ; 149.098,50.165 149.098,75.946
  Bottom Layer w0.254: v1(19.161,38.608) 21.844,38.608 24.257,41.021 ; v1(23.368,33.02) 24.257,33.909 ; v1(24.257,25.908) 24.257,33.909 ; v1(24.511,75.311) 24.425,75.225 24.425,62.168 v1(24.338,62.081) 24.257,62 24.257,41.021 ; v1(28.067,95.758) 28.13,95.694 32.703,95.694 v1(32.766,95.631) ; v1(45.842,38.1) 49.044,38.099 51.711,40.766 ; v1@48.548,25.78 51.711,28.943 51.711,35.074 ; v1(49.53,32.893) 51.711,35.074 ; v1(51.689,75.311) 51.711,75.289 51.711,61.998 v1(51.689,61.976) 51.711,61.954 51.711,40.766 ; v1(55.118,95.694) 55.15,95.663 59.912,95.663 v1(59.944,95.631) ; v1(72.884,38.099) 76.072,38.099 78.486,40.513 ; v1(76.058,25.78) 78.486,28.208 78.486,34.417 ; v1(76.962,32.893) 78.486,34.417 ; v1(78.486,75.438) v1(78.486,61.849) 78.486,40.513 ; v1(81.788,95.758) 81.852,95.694 87.058,95.694 v1(87.122,95.631) ; v1(100.203,38.354) 102.997,38.354 105.664,41.021 ; v2(103.378,26.035) 104.536,27.193 104.536,30.48 105.664,31.608 105.664,34.671 ; v1(103.886,32.893) 105.664,34.671 ; v1(105.664,75.692) v1(105.664,61.849) 105.664,41.021 ; v1(106.807,90.805) 146.812,90.805 v1(149.098,93.091) ; 24.257,33.909 24.257,41.021 ; 51.711,35.074 51.711,40.766 ; 78.486,34.417 78.486,40.513 ; 105.664,34.671 105.664,41.021
pads on no net: AGND.4 AGND.5 AGND.6 AGND.7

## Silkscreen, mask and mechanical layers (free items; w line width, h text height)
Top Overlay:
  text "R 1-4 FG" at 122.047,72.785 h1.27
  text "R 1-3 AMP G" at 127.381,44.972 h1.27
  text "R 1-4 LPF FC" at 124.714,22.302 h1.27

## Dimensions
0,101.473 to 152.4,101.473 on Mechanical 1

## Text inside footprints (layer, text, board x,y; h text height)
SW-LPFF: Mechanical 13 "OFF" at 137.046,34.85 h1.27; Mechanical 13 "ON" at 143.561,34.85 h1.27; Mechanical 13 "*" at 137.935,32.868 h1.27; Top Overlay "OFF" at 137.046,34.85 h1.27; Top Overlay "ON" at 143.561,34.85 h1.27; Top Overlay "*" at 136.69,33.503 h1.27
SW-LPFG: Mechanical 13 "OFF" at 136.919,84.888 h1.27; Mechanical 13 "ON" at 143.434,84.888 h1.27; Mechanical 13 "*" at 137.808,82.906 h1.27; Top Overlay "OFF" at 136.919,84.888 h1.27; Top Overlay "ON" at 143.434,84.888 h1.27; Top Overlay "*" at 136.563,83.541 h1.27